# EAGLE board BeagleCap2 (EAGLE 6.4)

Size 75.5 x 152 mm. Coordinates in mm from the lower left corner, seen from the top.
Outline: 0,152 75.5,152 75.5,0 0,0 0,91.5 arc90 6,96.5 6,114.5 arc90 1,120.5 0,120.5 0,152
Copper layers (1*16): Top 0.0356mm / dielectric 1.5011mm / Bottom 0.0356mm
Design rules "oshpark-2layer": minimum track width 6mil, minimum drill 13mil, track to track 6mil, track to pad 6mil, pad to pad 6mil, via to via 6mil, smd to smd 6mil, copper to edge 15mil, drill to drill 6mil, minimum pad ring 7mil, minimum via ring 7mil, stop-mask expansion 4mil, vias tented up to drill 0mil, thermal gap 10mil
Holes 2 mm at 2,2 73.5,2 73.5,150 2,150 38,73.5

## Footprints (pad centres in the part's own frame; a part is rotated, then mirrored left to right if it is on the bottom)
E2-5 = drill 0.813 pad 1.27: + -1.016,0 | drill 0.813 pad 1.27 octagon: - 1.016,0
DO35-10 = drill 0.813 long: A 5.08,0; C -5.08,0
SO16 = smd 0.66 x 2.032: 1 -4.445,-3.073; 2 -3.175,-3.073; 3 -1.905,-3.073; 4 -0.635,-3.073; 5 0.635,-3.073; 6 1.905,-3.073; 7 3.175,-3.073; 8 4.445,-3.073; 9 4.445,3.073; 10 3.175,3.073; 11 1.905,3.073; 12 0.635,3.073; 13 -0.635,3.073; 14 -1.905,3.073; 15 -3.175,3.073; 16 -4.445,3.073
10X03MTA = drill 1.016 long: 1 2.54,0; 2 0,0; 3 -2.54,0
10X05MTA = drill 1.016 long: 1 5.08,0; 2 2.54,0; 3 0,0; 4 -2.54,0; 5 -5.08,0
R0805 = smd 1.1 x 1.4: 1 -1,0; 2 1,0
EDG-01 = drill 0.813 long: 1 0,-3.81; 2 0,3.81
AM2302 = drill 0.8: DATA -1.27,0; GND 3.81,0; NULL 1.27,0 | drill 0.8 octagon: VDD -3.81,0
SOIC127P1032X265-16N = smd 1.981 x 0.533: 1 -4.699,4.445; 2 -4.699,3.175; 3 -4.699,1.905; 4 -4.699,0.635; 5 -4.699,-0.635; 6 -4.699,-1.905; 7 -4.699,-3.175; 8 -4.699,-4.445; 9 4.699,-4.445; 10 4.699,-3.175; 11 4.699,-1.905; 12 4.699,-0.635; 13 4.699,0.635; 14 4.699,1.905; 15 4.699,3.175; 16 4.699,4.445
BEAGLEBONE_SHIELD_NO_OUTLINE = drill 1 square: 1 4.445,19.05; 47 52.705,19.05 | drill 1: 2 1.905,19.05; 3 4.445,21.59; 4 1.905,21.59; 5 4.445,24.13; 6 1.905,24.13; 7 4.445,26.67; 8 1.905,26.67; 9 4.445,29.21; 10 1.905,29.21; 11 4.445,31.75; 12 1.905,31.75; 13 4.445,34.29; 14 1.905,34.29; 15 4.445,36.83; 16 1.905,36.83; 17 4.445,39.37; 18 1.905,39.37; 19 4.445,41.91; 20 1.905,41.91; 21 4.445,44.45; 22 1.905,44.45; 23 4.445,46.99; 24 1.905,46.99; 25 4.445,49.53; 26 1.905,49.53; 27 4.445,52.07; 28 1.905,52.07; 29 4.445,54.61; 30 1.905,54.61; 31 4.445,57.15; 32 1.905,57.15; 33 4.445,59.69; 34 1.905,59.69; 35 4.445,62.23; 36 1.905,62.23; 37 4.445,64.77; 38 1.905,64.77; 39 4.445,67.31; 40 1.905,67.31; 41 4.445,69.85; 42 1.905,69.85; 43 4.445,72.39; 44 1.905,72.39; 45 4.445,74.93; 46 1.905,74.93; 48 50.165,19.05; 49 52.705,21.59; 50 50.165,21.59; 51 52.705,24.13; 52 50.165,24.13; 53 52.705,26.67; 54 50.165,26.67; 55 52.705,29.21; 56 50.165,29.21; 57 52.705,31.75; 58 50.165,31.75; 59 52.705,34.29; 60 50.165,34.29; 61 52.705,36.83; 62 50.165,36.83; 63 52.705,39.37; 64 50.165,39.37; 65 52.705,41.91; 66 50.165,41.91; 67 52.705,44.45; 68 50.165,44.45; 69 52.705,46.99; 70 50.165,46.99; 71 52.705,49.53; 72 50.165,49.53; 73 52.705,52.07; 74 50.165,52.07; 75 52.705,54.61; 76 50.165,54.61; 77 52.705,57.15; 78 50.165,57.15; 79 52.705,59.69; 80 50.165,59.69; 81 52.705,62.23; 82 50.165,62.23; 83 52.705,64.77; 84 50.165,64.77; 85 52.705,67.31; 86 50.165,67.31; 87 52.705,69.85; 88 50.165,69.85; 89 52.705,72.39; 90 50.165,72.39; 91 52.705,74.93; 92 50.165,74.93
ATLAS_STAMP = drill 0.8 square: GND 4.445,18.97; PGND 9.525,1.03 | drill 0.8: PRB 6.95,1.03; RX 9.525,18.97; TX 6.985,18.97; VCC 4.445,1.03
AMP_227161 = drill 0.9 pad 1.27: 1 0,-5.08; 2 -2.54,-5.08 | hole 2: -5.08,0; 5.08,0

## Placement (x,y rotation side)
C4  10uF  [E2-5]  70,80 0 top
D3  1N4148DO35-10  [DO35-10]  63,63.5 180 top
D4  1N4148DO35-10  [DO35-10]  63,72 180 top
IC1  74123D  [SO16]  64,94 0 top
J2  DS18B20  [10X03MTA]  53,51 0 top
J4  [10X05MTA]  72.5,69 270 top
R1  100  [R0805]  65.16,56.66 270 top
R2  4.7K  [R0805]  62.08,56.66 270 top
R3  100  [R0805]  55.5,56.66 270 top
R4  4.7K  [R0805]  50.42,56.66 270 top
R5  4.7K  [R0805]  40.5,65 0 top
R6  4.7K  [R0805]  40.5,62 0 top
R8  1K  [R0805]  63,69 180 top
R9  4.7K  [R0805]  63,66 0 top
R10  4.7K  [R0805]  63,75 0 top
R11  4.7K  [R0805]  69,46.5 0 top
R14  110K  [R0805]  51.5,32 0 top
R15  4.7K  [R0805]  42.5,22 0 top
SW1  [EDG-01]  65.5,36.5 0 top
SW2  [EDG-01]  59.5,36.5 180 top
U1  DHT22  [AM2302]  66.11,51.74 0 top
U2  DS3231SN  [SOIC127P1032X265-16N]  47,95.5 90 top
U$1  BEAGLEBONE_NO_OUTLINE  [BEAGLEBONE_SHIELD_NO_OUTLINE]  -14.43,78.6 90 bottom
U$2  ATLAS_STAMP  [ATLAS_STAMP]  16,54.5 270 top
U$3  ATLAS_STAMP  [ATLAS_STAMP]  16,72 270 top
U$4  ATLAS_STAMP  [ATLAS_STAMP]  16,37 270 top
X1  Conn BNC : pH  [AMP_227161]  7,47.5 90 top
X2  Conn BNC : Dissolved Oxygen  [AMP_227161]  7,65 90 top
X3  Conn BNC : Conductivity  [AMP_227161]  7,30 90 top

## Library data of the parts
C4 = rcl
D3 D4 = diode
IC1 = 74xx-us
J2 J4 = con-amp
R1-R6 R8-R11 R14 R15 = adafruit
SW1 SW2 = special
U1 = RHT03_DHT-22_AM2302; PROD_ID: SEN-10167
U2 = Maxim_By_element14_Batch_1; MPN: DS3231SN#; OC_FARNELL: 1593292; OC_NEWARK: 68K3406; PACKAGE: SOIC-16; SUPPLIER: Maxim
U$1-U$4 = LEDscape
X1-X3 = con-coax; MF: TYCO ELECTRONICS; MPN: 1-227161; OC_FARNELL: unknown; OC_NEWARK: 33B3200

## Nets
3.3V: J2.3 R2.2 R4.1 R5.2 R6.2 U1.VDD U$1.49 U$1.50 U$2.VCC U$3.VCC U$4.VCC
5V: IC1.2 IC1.3 IC1.16 J4.1 R9.1 R10.1 R14.1 R15.1 U2.2 U$1.51
AIN0: U$1.85
DO_SENSOR: U$3.PRB X2.1
GND: C4.- IC1.8 IC1.14 J2.2 J4.5 SW1.1 SW2.2 U1.GND U2.5 U2.6 U2.7 U2.8 U2.9 U2.10 U2.11 U2.12 U2.13 U2.14 U$1.1 U$1.2 U$1.47 U$1.48 U$1.89 U$1.90 U$1.91 U$1.92 U$2.GND U$2.PGND U$3.GND U$3.PGND U$4.GND U$4.PGND X1.2 X2.2 X3.2
I2C2_SCL: R5.1 U2.16 U$1.65 U$2.TX U$3.TX U$4.TX
I2C2_SDA: R6.1 U2.15 U$1.66 U$2.RX U$3.RX U$4.RX
INT: IC1.1 R15.2 U2.3
K_SENSOR: U$4.PRB X3.1
N$1: U$1.52
N$3: R1.2 R2.1 U1.DATA
N$4: R3.1 U$1.11
N$5: J2.1 R3.2 R4.2
N$6: R1.1 U$1.16
N$7: R11.1 SW1.2 U$1.58
N$9: D3.C J4.2 R9.2
N$10: J4.3 R8.1
N$11: D4.C J4.4 R10.2
N$12: U2.4
N$17: C4.+ IC1.15 R14.2
N$20: IC1.13
P: D4.A U$1.88
PH_SENSOR: U$2.PRB X1.1
PWR_BUT: IC1.4 SW2.1 U$1.55
RX: R8.2 U$1.72
SYS_5V: U$1.53
TX: D3.A U$1.70
VCC: R11.2

## Tracks (layer width: path | path; a pad name or v marks a point on that pad's centre or on a via)
3.3V  (10 unrouted)
5V  (9 unrouted)
DO_SENSOR  (1 unrouted)
GND  (34 unrouted)
I2C2_SCL  (5 unrouted)
I2C2_SDA  (5 unrouted)
INT  (2 unrouted)
K_SENSOR  (1 unrouted)
N$3  (2 unrouted)
N$4  (1 unrouted)
N$5  (2 unrouted)
N$6  (1 unrouted)
N$7  (2 unrouted)
N$9  (2 unrouted)
N$10  (1 unrouted)
N$11  (2 unrouted)
N$17  (2 unrouted)
P  (1 unrouted)
PH_SENSOR  (1 unrouted)
PWR_BUT  (2 unrouted)
RX  (1 unrouted)
TX  (1 unrouted)

## Text on the board
tPlace: AQUARIUS | Jean-Philippe Fournier / Jean-Pascal McGee